# Altium PCB BM78SPP05NC2-Based-OBD-final.PcbDoc
Units mil, origin at the board's own origin, x right, y up, seen from the top; angles counter-clockwise.
Board outline 2896 x 2222 mil, 2 copper layers (Top Layer, Bottom Layer); 63 components, 39 nets, 267 pads, 140 vias.
Unrouted connection lines stored in the file: 3.
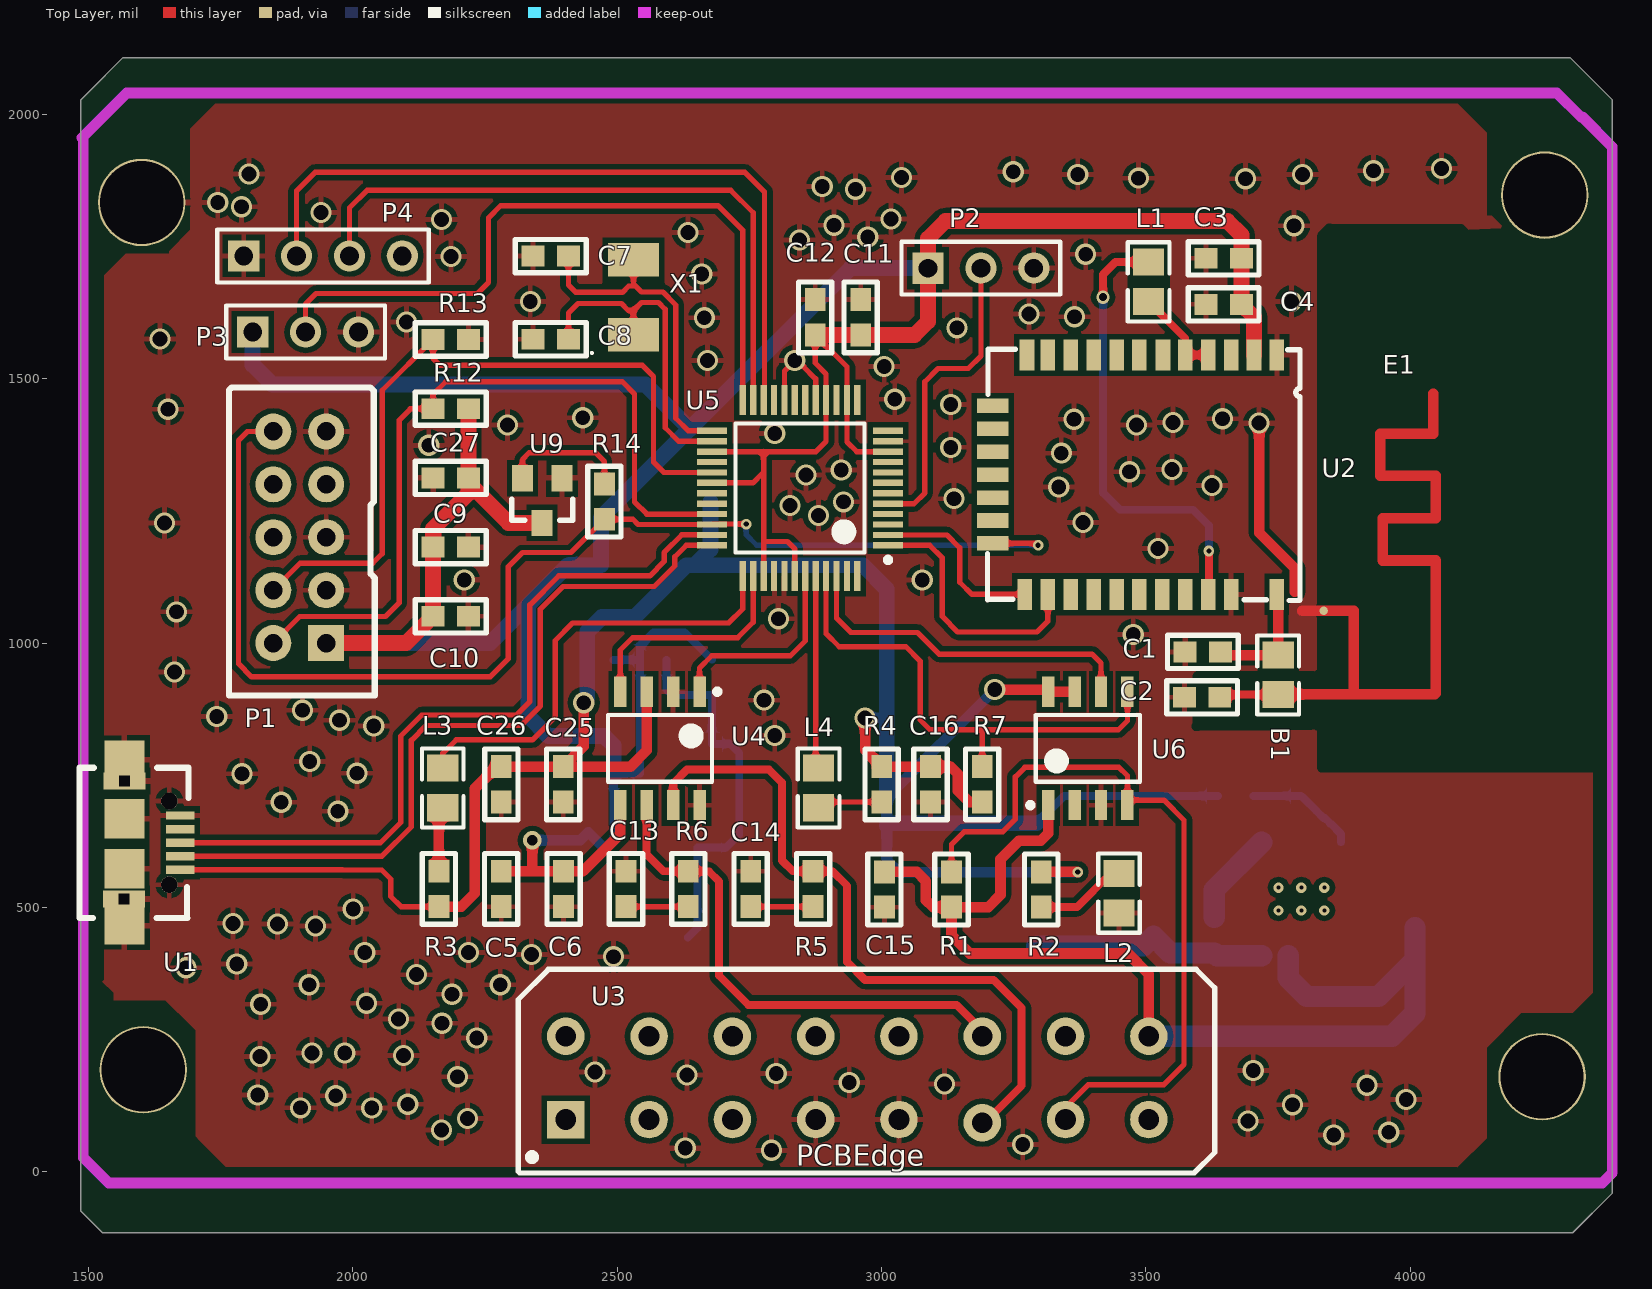
[diagram p0: Top Layer view]
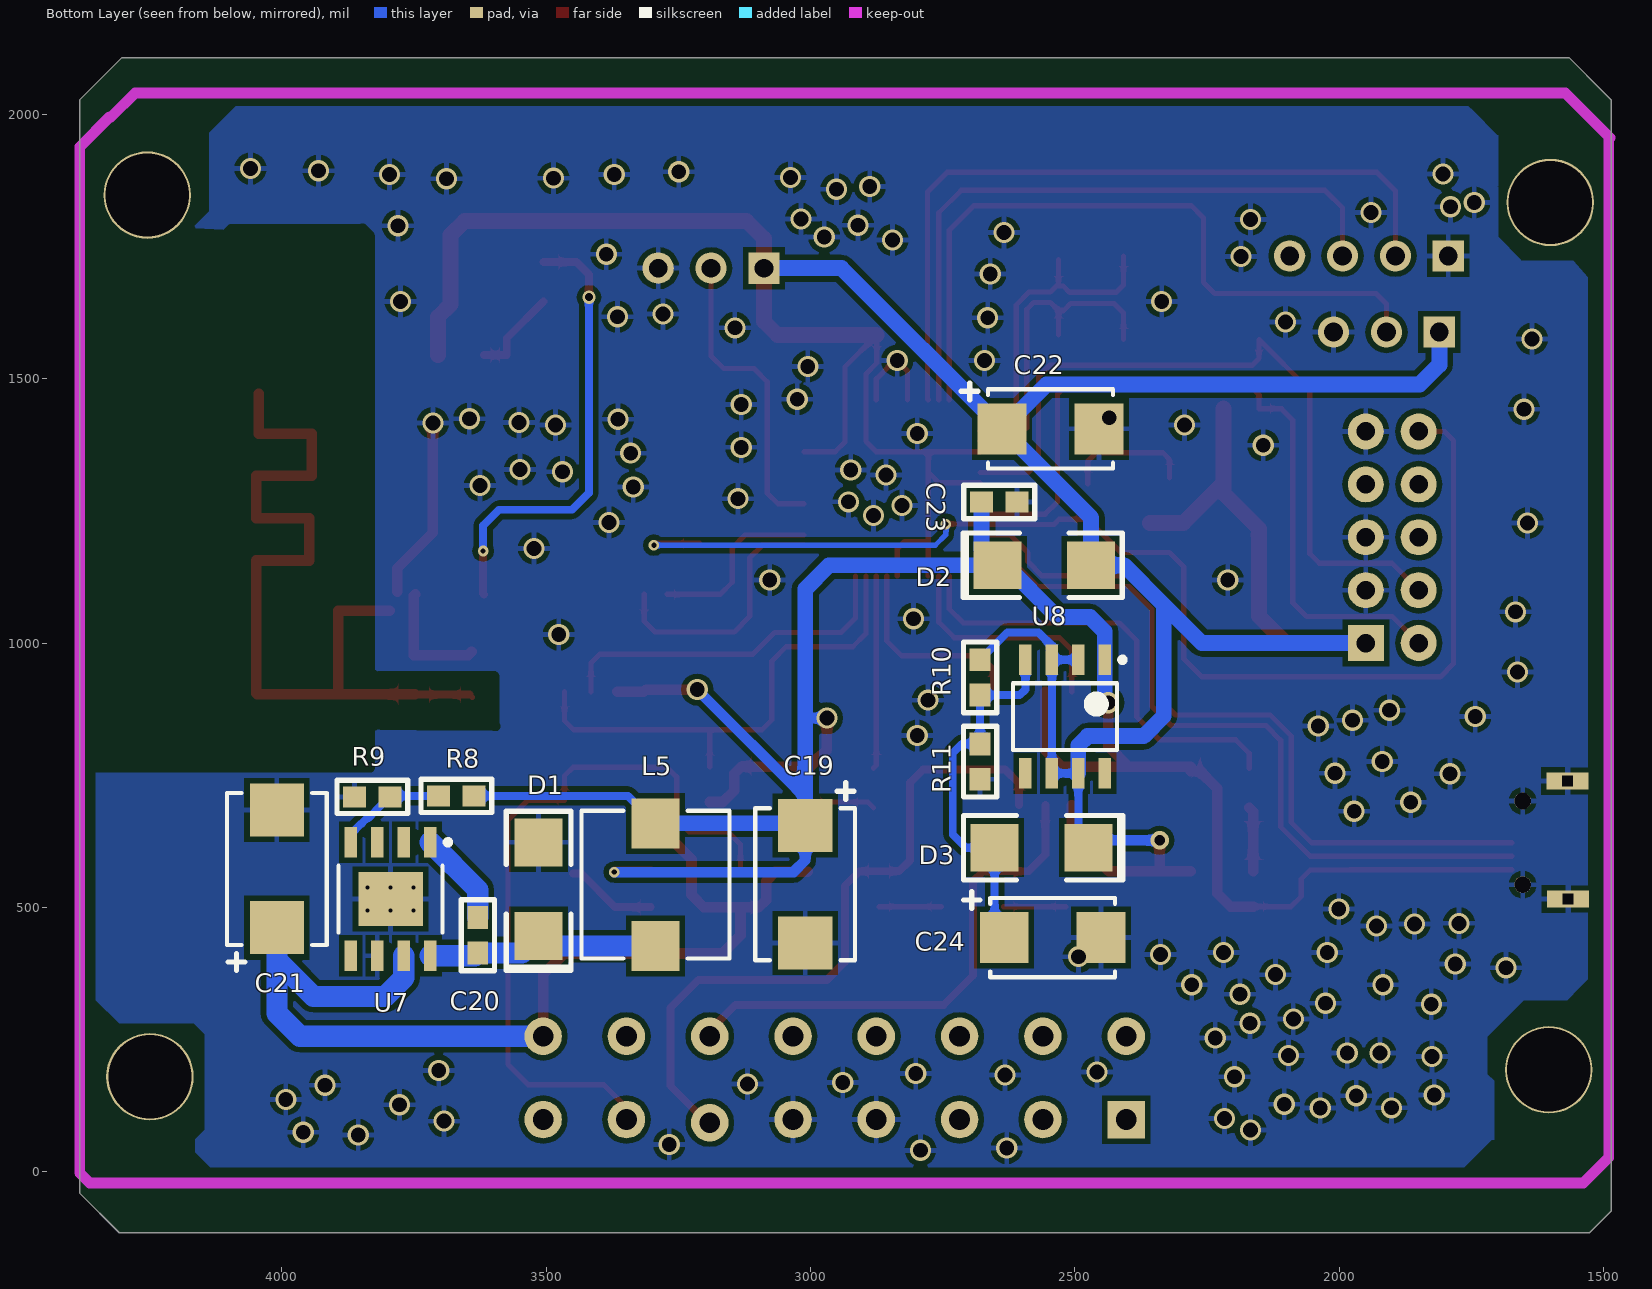
[diagram p1: Bottom Layer view, seen from below]

## Layer stack, top to bottom
Top Solder: solder mask 0.4, Solder Resist, Dk 3.5
Top Layer: signal copper 1.4
Dielectric 1: dielectric 12.6, FR-4, Dk 4.8
Bottom Layer: signal copper 1.4
Bottom Solder: solder mask 0.4, Solder Resist, Dk 3.5

## Board outline
1486,-74 1486,2027 1499,2040 1566,2107 4302,2107 4382,2027 4382,-40 4307,-115 1527,-115

## Design rules (kind name [scope] priority, off if disabled: settings)
Clearance [All] p1: gap=10
DiffPairsRouting DiffPair_DiffPairsRouting [InDifferentialPair ('NewDifferentialPair1')] p1: maxlimit=10 minlimit=5 mostfreqgap=10 toplayer_minwidth=10 toplayer_maxwidth=15 toplayer_prefwidth=10 bottomlayer_minwidth=10 bottomlayer_maxwidth=15 bottomlayer_prefwidth=10 maxuncoupledlength=2000
DiffPairsRouting DiffPair_DiffPairsRouting_1 [InDifferentialPair ('D_D')] p2: maxlimit=10 minlimit=5 mostfreqgap=10 toplayer_minwidth=10 toplayer_maxwidth=15 toplayer_prefwidth=15 bottomlayer_minwidth=10 bottomlayer_maxwidth=15 bottomlayer_prefwidth=15 maxuncoupledlength=500
DiffPairsRouting DiffPair_DiffPairsRouting_2 [InDifferentialPair ('D_D')] p3: maxlimit=10 minlimit=5 mostfreqgap=10 toplayer_minwidth=15 toplayer_maxwidth=15 toplayer_prefwidth=15 bottomlayer_minwidth=15 bottomlayer_maxwidth=15 bottomlayer_prefwidth=15 maxuncoupledlength=500
DiffPairsRouting DiffPair_DiffPairsRouting_3 [InDifferentialPair ('D_D')] p4: maxlimit=10 minlimit=10 mostfreqgap=10 toplayer_minwidth=15 toplayer_maxwidth=15 toplayer_prefwidth=15 bottomlayer_minwidth=15 bottomlayer_maxwidth=15 bottomlayer_prefwidth=15 maxuncoupledlength=500
DiffPairsRouting [All] p5: maxlimit=10 minlimit=10 mostfreqgap=10 toplayer_minwidth=10 toplayer_maxwidth=15 toplayer_prefwidth=15 bottomlayer_minwidth=10 bottomlayer_maxwidth=15 bottomlayer_prefwidth=15 maxuncoupledlength=500
MatchedLengths DiffPair_MatchedLengths [InDifferentialPair ('NewDifferentialPair1')] p1: tolerance=2000 checknetsindiffpair=TRUE checkdiffpairvsdiffpair=FALSE checkxsignals=FALSE checkothers=FALSE
MatchedLengths DiffPair_MatchedLengths_1 [InDifferentialPair ('D_D')] p2: tolerance=1000 checknetsindiffpair=TRUE checkdiffpairvsdiffpair=FALSE checkxsignals=FALSE checkothers=FALSE
MatchedLengths DiffPair_MatchedLengths_2 [InDifferentialPair ('D_D')] p3: tolerance=1000 checknetsindiffpair=FALSE checkdiffpairvsdiffpair=TRUE checkxsignals=TRUE checkothers=TRUE
MatchedLengths DiffPair_MatchedLengths_3 [InDifferentialPair ('D_D')] p4: tolerance=1000 checknetsindiffpair=TRUE checkdiffpairvsdiffpair=FALSE checkxsignals=FALSE checkothers=FALSE
PolygonConnect [All] p1: connectstyle=Relief reliefconductorwidth=10 reliefentries=4 polygonreliefangle="90 Angle" airgapwidth=10
RoutingVias [All] p1: holewidth=15 width=25 viastyle="Through Hole" minholewidth=10 minwidth=15 maxholewidth=28 maxwidth=40
SolderMaskExpansion [All] p1: expansion=4
Width [All] p1: maxlimit=50 minlimit=10 preferedwidth=15
29 further rules are at their usual default settings.

## Components (designator, comment, footprint, x,y, rotation, side; value= is the part's Value field where it differs from the comment)
B1 "1nH" 0805 3750,939.7 r270 top
C1 "15pf" 0603 3607.54,982.91 r0 top
C2 "15pF" 0603 3606,897 r0 top
C3 "0.1uF" 0603 3646.87,1727.04 r0 top
C4 "10uF" 0603 3646.87,1640 r0 top
C5 "10uF" 0603 2281.33,535 r90 top
C6 "0.1uF" 0603 2399.26,535 r90 top
C7 "22pF" 0603 2374.54,1732.06 r180 top
C8 "22pF" 0603 2374.54,1574.79 r180 top
C9 "4.7uF" 0603 2185.54,1181.85 r180 top
C10 "0.1uF" 0603 2185.54,1051 r180 top
C11 "10uF" 0603 2961,1615.83 r90 top
C12 "0.1uF" 0603 2875,1615.83 r90 top
C13 "560pF" 0603 2516.41,535 r270 top
C14 "560pF" 0603 2752.28,535 r270 top
C15 "0.1uF" 0603 3005,534 r270 top
C16 "0.1uF" 0603 3093,732.87 r90 top
C19 "220uF" CAPM-7.0*4.5 3010,544 r270 bottom
C20 "0.01uF" 0603 3629.39,447.54 r270 bottom
C21 "10uF/16V" CAPM-7.0*4.5 4009,573 r90 bottom
C22 "10uF/16V" CAPM-5.5*3.3 2546,1405 r180 bottom
C23 "0.1uF" 0603 2643,1267 r0 bottom
C24 "10uF/16V" CAPM-5.5*3.3 2542.13,443 r180 bottom
C25 "0.1uF" 0603 2397.74,732.87 r270 top
C26 "10uF" 0603 2280.73,732.87 r270 top
C27 "0.1uF" 0603 2185.54,1311.91 r0 top
D1 "B340A" DO214-AC 3514,534.58 r270 bottom
D2 "1N4007" DO214-AC 2558,1147 r0 bottom
D3 "1N4007" DO214-AC 2563.23,613 r180 bottom
E1 "PCB_ANT" BM78SPP05NC2_ANT 3748,903 r0 top
L1 "LED" 0805 3505,1683 r90 top
L2 "LED" 0805 3448.99,527.13 r270 top
L3 "LED" 0805 2170.44,726 r90 top
L4 "LED" 0805 2881,726 r90 top
L5 "15uH" 7*7*4-15uH 3293,543 r90 bottom
P1 "Debug" JATG_10pin 1950,1000 r180 top
P2 "" HDR1X3 3088,1708.87 r0 top
P3 "" HDR1X3 1811,1588 r0 top
P4 "downloader" HDR1X4 1794,1732 r0 top
R1 "510R" 0603 3132,534 r270 top
R2 "330R" 0603 3301.61,534 r270 top
R3 "330R" 0603 2163.39,535 r90 top
R4 "330R" 0603 3000,732.87 r270 top
R5 "100R" 0603 2871,535 r90 top
R6 "100R" 0603 2635.13,535 r90 top
R7 "3.3K" 0603 3190,732.87 r270 top
R8 "10K" 0603 3669.53,710.61 r180 bottom
R9 "3.24K" 0603 3828.46,708.61 r180 bottom
R10 "470R" 0603 2678.98,935 r90 bottom
R11 "820R" 0603 2678.98,776 r90 bottom
R12 "10K" 0603 2185.54,1443.55 r180 top
R13 "10K" 0603 2185.54,1574.39 r180 top
R14 "100K" 0603 2476.39,1267.46 r90 top
U1 "MicroUSB" Micro-USB 1568.68,780.07 r0 top
U2 "BM78SPP05NC2" BM78SPP05NC2 3200.29,1554.6 r270 top
U3 "OBD-Connector" OBD-MaleConnector 2403.08,99 r0 top
U4 "TJF1051T / 3" TJF1051 2574,798.77 r270 top
U5 "LPC1549" LPC1549JBD48 2847,1297 r180 top
U6 "MC33660EFR2" SOP-8 3390,800.77 r90 top
U7 "TPS5430" TPS5430 3794,516 r270 bottom
U8 "LM317L" LM317L 2518.64,860 r270 bottom
U9 "IMP809TEUR-T" SOT23-3 2358,1227 r180 top
X1 "12MHZ" 12Mhz-DFN 2530,1653 r270 top

## Footprints (in the part's own frame and the unit in brackets; to place one, negate y for a bottom-side part, rotate by r counter-clockwise, add the part's x,y. Pads: shape width x height; smd on the part's side, far side on the other; paste and mask are expansions set on the pad)
7*7*4-15uH [mm] "Precision Wire Wound Inductor, 2-Leads, Body 7.00x7.00mm, IPC Medium Density"
  rect 2.4x2.3 smd: 1(-2.95,0) 2(2.95,0)
  silkscreen extent -3.55,-3.55 3.55,3.55
12Mhz-DFN [mm]
  rect 1.6x2.45 smd: 1(1.78,0.025) 2(-1.82,0.025)
  silkscreen extent 2.6,-2.02 2.7,-1.92, body extent -2.65,-1.57 2.65,1.63, height 0.45
0603 [mm]
  rect 1.1x1 smd: 1(-0.85,0.01) 2(0.85,0.01)
  silkscreen extent -1.7,-0.79 1.7,0.81
0805 [mm]
  rect 1.3x1.5 smd: 1(-0.95,0) 2(0.95,0)
  silkscreen extent -1.9,-1 1.9,1
BM78SPP05NC2 [mm]
  rect 1.5x0.7 smd: 1(0.25,13.9) 2(0.25,12.8) 3(0.25,11.7) 4(0.25,10.6) 5(0.25,9.5) 6(0.25,8.43) 7(0.25,7.3) 8(0.25,6.2) 9(0.25,5.1) 10(0.25,4) 11(0.25,2.9) 12(0.25,1.9) 20(11.75,1.8) 21(11.75,2.9) 22(11.75,4) 23(11.75,5.1) 24(11.75,6.2) 25(11.75,7.3) 26(11.75,8.4) 27(11.75,9.5) 28(11.75,10.6) 29(11.75,11.7) 30(11.75,13.9)
  rect 0.7x1.5 smd: 13(2.7,0.25) 14(3.8,0.25) 15(4.9,0.25) 16(6,0.25) 17(7.1,0.25) 18(8.2,0.25) 19(9.3,0.25)
  silkscreen extent -0.03,0 12.04,15.01
BM78SPP05NC2_ANT [mm]
  round 0.4 smd: 1(0,0) 2(2.235,4.013)
  Top Layer lines w0.508: -0.002,0 0,0 0.051,0 3.683,0 ; 2.286,4.013 3.683,4.013 3.683,0.03 3.683,0 ; 7.493,14.427 7.493,12.522 4.953,12.522 4.953,10.49 7.62,10.49 7.62,8.458 5.08,8.458 5.08,6.426 7.62,6.426 7.62,0.051 ; 3.683,0 7.569,0 7.599,0.03 7.62,0.051 ; 7.62,0.051 7.62,0.051
CAPM-5.5*3.3 [mm]
  rect 2.35x2.45 smd: 1(-2.325,0) 2(2.325,0)
  silkscreen extent -4.29,-1.9 3,2.2
CAPM-7.0*4.5 [mm] "Molded Capacitor, 2-Leads, Body 7.00x4.50mm, IPC Medium Density"
  rect 2.55x2.6 smd: 1(-2.825,0) 2(2.825,0)
  silkscreen extent -4.87,-2.4 3.65,2.4
DO214-AC [mm]
  rect 2.3x2.3 smd: 1(-2.25,0) 2(2.25,0)
  silkscreen extent -3.75,-1.55 3.9,1.55
HDR1X3 [mm] "Connector; Header; 3 Position"
  rect 1.5x1.5 hole 0.9: 1(0,0)
  round 1.5 hole 0.9: 2(2.54,0) 3(5.08,0)
  silkscreen extent -1.27,-1.27 6.35,1.27
HDR1X4 [mm] "Connector; Header; 4 Position"
  rect 1.5x1.5 hole 0.9: 1(0,0)
  round 1.5 hole 0.9: 2(2.54,0) 3(5.08,0) 4(7.62,0)
  silkscreen extent -1.27,-1.27 8.89,1.27
JATG_10pin [mil]
  rect 68x68 hole 35: 1(0,0)
  round 68 hole 35: 2(100,0) 3(0,-100) 4(100,-100) 5(0,-200) 6(100,-200) 7(0,-300) 8(100,-300) 9(0,-400) 10(100,-400)
  silkscreen extent -92,-483 184,99
LM317L [mm]
  rect 1.45x0.6 smd: 1(-2.75,1.905) 2(-2.75,0.635) 3(-2.75,-0.635) 4(-2.75,-1.905) 5(2.7,-1.905) 6(2.7,-0.635) 7(2.7,0.635) 8(2.7,1.905)
  silkscreen extent -2.88,-2.5 1.57,2.88
LPC1549JBD48 [mm]
  rect 1.45x0.3 smd: 1(-4.2,2.852) 2(-4.2,2.352) 3(-4.2,1.852) 4(-4.2,1.352) 5(-4.2,0.852) 6(-4.2,0.352) 7(-4.2,-0.148) 8(-4.2,-0.648) 9(-4.2,-1.148) 10(-4.2,-1.648) 11(-4.2,-2.148) 12(-4.2,-2.648) 25(4.25,-2.648) 26(4.25,-2.148) 27(4.25,-1.648) 28(4.25,-1.148) 29(4.25,-0.648) 30(4.25,-0.148) 31(4.25,0.352) 32(4.25,0.852) 33(4.25,1.352) 34(4.25,1.852) 35(4.25,2.352) 36(4.25,2.852)
  rect 0.3x1.45 smd: 13(-2.725,-4.123) 14(-2.225,-4.123) 15(-1.725,-4.123) 16(-1.225,-4.123) 17(-0.725,-4.123) 18(-0.225,-4.123) 19(0.275,-4.123) 20(0.775,-4.123) 21(1.275,-4.123) 22(1.775,-4.123) 23(2.275,-4.123) 24(2.775,-4.123) 37(2.775,4.327) 38(2.275,4.327) 39(1.775,4.327) 40(1.275,4.327) 41(0.775,4.327) 42(0.275,4.327) 43(-0.225,4.327) 44(-0.725,4.327) 45(-1.225,4.327) 46(-1.725,4.327) 47(-2.225,4.327) 48(-2.725,4.327)
  silkscreen extent -4.32,-3 3.13,3.68
Micro-USB [mm]
  rect 2x0.8 hole 0.5 square: 1(-0.025,-6.706) 1(0,-1.041)
  rect 1.9x1.8 smd: 1(0,-8) 1(0,0)
  rect 1.9x1.9 smd: 1(0,-5.25) 1(0,-2.85)
  round 0.8 hole 0.8: 1(2.15,-6.02) 1(2.15,-2)
  rect 1.35x0.4 smd: 1(2.675,-2.7) 2(2.675,-3.35) 3(2.675,-4) 4(2.675,-4.65) 5(2.675,-5.3)
  silkscreen extent -2.16,-7.62 3.07,-0.41
OBD-MaleConnector [mm]
  rect 1.8x1.8 hole 1: 1(0,0)
  round 1.8 hole 1: 2(4,0) 3(8,0) 4(12,0) 5(16,0) 6(20,-0.152) 7(24,0) 8(28,0) 9(0,4) 10(4,4) 11(8,4) 12(12,4) 13(16,4) 14(20,4) 15(24,4) 16(28,4)
  silkscreen extent -2.29,-2.57 31.17,7.21
SOP-8 [mm]
  rect 1.45x0.6 smd: 1(-2.725,1.905) 2(-2.725,0.635) 3(-2.725,-0.635) 4(-2.725,-1.905) 5(2.725,-1.905) 6(2.725,-0.635) 7(2.725,0.635) 8(2.725,1.905)
  silkscreen extent -2.85,-2.5 1.6,2.88
SOT23-3 [mil]
  rect 40x50 smd: 1(-37.99,-85) 2(37.01,-85) 3(0.01,0)
  silkscreen extent -58,-45 57,-5
TJF1051 [mm]
  rect 1.45x0.6 smd: 1(-2.776,2.083) 2(-2.776,0.813) 3(-2.776,-0.457) 4(-2.776,-1.727) 5(2.674,-1.727) 6(2.674,-0.457) 7(2.674,0.813) 8(2.674,2.083)
  silkscreen extent -2.9,-2.32 1.55,3.06
TPS5430 [mm]
  rect 1.45x0.6 smd: 1(-2.725,1.905) 2(-2.725,0.635) 3(-2.725,-0.635) 4(-2.725,-1.905) 5(2.725,-1.905) 6(2.725,-0.635) 7(2.725,0.635) 8(2.725,1.905)
  rect 2.6x3.1 smd: 9(0,0)
  silkscreen extent -2.85,-2.5 1.6,2.88

## Part data
B1: library part Bead
C1 C2 C3 C4 C5 C6 C7 C8 C9 C10 C11 C12 C13 C14 C15 C16 C20 C23 C25 C26 C27: library part Cap1, "ceramic"
C19 C21 C22 C24: library part Cap3, "aluminum"
D1: library part B340A-13-F
L5: library part Inductor
P1: library part JTAG_10Pin
P2 P3: library part "Header 3", "Header, 3-Pin"
P4: library part "Header 4", "Header, 4-Pin"
R1 R2 R3 R4 R5 R6 R7 R8 R9 R10 R11 R12 R13 R14: library part Res
U1: library part MicroUSB_B
U3: library part OBD-MaleHead
U5: library part LPC1549JBD48
X1: library part OSC

## Free pads (board coordinates)
  round 165.35 hole 157.48: 120(4254,1847) 121(1601,1833) 122(1604,193) 123(4249,180)

## Via types
v1: diameter 40, hole 28, Top Layer to Bottom Layer, 128 vias
v2: diameter 19.68, hole 7.87, Top Layer to Bottom Layer, 6 vias
v3: diameter 20, hole 10, Top Layer to Bottom Layer, 4 vias
v4: diameter 35, hole 20, Top Layer to Bottom Layer, 1 vias
v5: diameter 25, hole 15, Top Layer to Bottom Layer, 1 vias

## Nets (pads, with @x,y where several pads share a name; then routed paths per layer and width w, separated by ;. In a path a pad name is that pad's centre, name@x,y a point inside that pad or via, vN(x,y) a via of type N, cw(c..) or ccw(c..) an arc to the next point about the centre after c; other vN are vias at no path point)
3.3V: C3.2 C4.2 C5.2 C6.2 C9.2 C10.2 C11.1 C12.1 C22.1 C27.2 D2.1 D3.2 P1.1 P2.1 P3.1 R10.2 R12.1 U2.2 U4.5 U5.10 U5.14 U5.16 U5.27 U5.30 U5.39 U5.42 U8.2 U8.3 U8.6 U8.7 U9.3 | length 7284.7
  Top Layer w10: U5.30 2756.84,1302.84 2774,1320 ; U5.27 2777.1,1361.9 ; U5.39 2777.1,1193 ; U5.42 2836.16,1177.84 2822,1192 2778.1,1192 2777.1,1193 ; C12.1@2874.61,1572.39 2874.61,1529.39 2895.21,1508.79 U5.16 2895.21,1381.21 2875.9,1361.9 2777.1,1361.9 ; C12.1 2934.58,1522.39 U5.14 2934.58,1380.42 2953.1,1361.9 U5.10 ; 2777.1,1193 2777.1,1361.9
  Top Layer w20: C5.2 2340,568.46 ; v4(2340,627) 2340,568.46 ; U4.5 2506,639 2435.46,568.46 C6.2 2340,568.46
  Top Layer w30: P1.1 2101.47,1000 C10.2 C9.2 2152.07,1216.07 2219,1283 C27.2@2219,1303 ; R12.1 C27.2 C27.2@2219,1303 ; U9.3 2295,1227 C27.2@2219,1303 ; C12.1 C11.1 3062.36,1582.36 3088,1608 P2.1 3088,1765 3121,1798 3654,1798 3680.34,1771.66 C3.2 C4.2 3704.23,1616.5 U2.2
  Bottom Layer w15: D3.2 2493.64,631.99 U8.7 U8.6 U8.3 ; U8.2 U8.3 ; R10.2 2627.84,1020 2569,1020 2543.64,994.64 U8.3
  Bottom Layer w20: v4(2340,627) 2430.65,627 2445.65,642 D3.2
  Bottom Layer w30: P3.1 1811,1526 1848,1489 2553.54,1489 C22.1 ; P1.1 2260,1000 2332,1072 ; U8.7 2493.64,806.36 2476,824 2370,824 2332,862 2332,1072 ; P2.1 2941.4,1708.87 C22.1 ; 2332,1072 2407,1147 D2.1 2469.42,1236.88 C22.1
5V: C16.2 C19.1 C23.2 C25.1 C26.1 D2.2 L5.2 R2.1 R3.1 R4.1 R7.2 R8.2 U1.5 U4.3 U6.7 U6.8 U8.1 | length 4753.3
  Top Layer w10: U1.5 1980.93,571.41 1981.31,571.03 2054.97,571.03 2072,554 2072,521 2091.46,501.54 R3.1
  Top Layer w20: R3.1 2205.54,501.54 2231,527 2231,725 2263.69,757.69 2281.13,757.69 C26.1 C25.1 ; v1(2437,887) 2437,805.21 C25.1 ; U4.3 2556,797 2525.34,766.34 C25.1 ; v1(2969,858) 2969,797.73 R4.1 C16.2 3130.66,766.34 3144,753 3144,721 3165.59,699.41 R7.2 ; v1(3214,912) 3311.06,912 U6.8 U6.7 ; R2.1 3370.46,567.46 v3(3370.93,567)
  Bottom Layer w15: L5.2 3344.86,711 R8.2
  Bottom Layer w20: v1(2969,858) 3008,858 3010,856 ; v1(3214,912) 3010,708 C19.1 3010,589 3032,567 v3(3370.93,567)
  Bottom Layer w30: v1(2437,887) 2443.64,893.64 U8.1 2443.64,1021.64 2471,1049 2533,1049 2631,1147 D2.2 ; C23.2 2676.47,1176.88 D2.2 ; C19.1 3013.92,659.14 L5.2 ; 3010,708 3010,856 3010,1102 2965,1147 D2.2
12V: C15.1 C21.1 R1.2 U3.16 U6.1 U7.7 | length 2090.8
  Top Layer w20: C15.1 3066.46,567.46 3084,549.93 3084,514 3097.46,500.54 R1.2 ; U6.1 3315,640 3301,626 3260,626 3225,591 3225,524 3201.54,500.54 R1.2 ; U3.16 3505.44,373.56 3466,413 3167,413 3132.39,447.61 R1.2
  Bottom Layer w40: U3.16 3965.48,256.48 4009,300 4009,401 ; U7.7 3769,367 3804,332 3940,332 4009,401 ; C21.1 4009,401
ADJ: C24.1 D3.1 R10.1 R11.2 U8.4 | length 718.1
  Bottom Layer w15: U8.4 2593.64,912.36 2604.46,901.54 R10.1 R11.2 2713.54,809.46 2731,792 2731,638 2706,613 D3.1 2651.82,461.16 C24.1
BL_RX: U2.20 U5.2 | length 343.5
  Top Layer w10: U5.2 3123.58,1204.42 3148,1180 3148,1115 3171,1092 U2.20
BL_TX: U2.21 U5.1 | length 494
  Top Layer w10: U5.1 3091.27,1184.73 3115,1161 3115,1050 3144,1021 3294,1021 3314.46,1041.46 U2.21
BOOT: C20.1 U7.1 | length 179.6
  Bottom Layer w40: C20.1 3629,533.28 U7.1
CAN_H: R5.2 U3.6 U4.7 | length 1319.1
  Top Layer w15: U4.7 2606,735 2632,761 2787,761 2812,736 2812,589 2832.54,568.46 R5.2 2907.54,568.46 2935,541 2935,397 2969,363 3212,363 3265,310 3265,163 3195,93 U3.6
CAN_L: R6.2 U3.14 U4.6 | length 981
  Top Layer w15: U4.6 2556,600 2587.54,568.46 R6.2 2673.54,568.46 2693,549 2693,371 2748,316 3142,316 3190.48,267.52 U3.14
D+: U1.3 U5.35 | length 1460.1
  Top Layer w10: U1.3 1990.62,622.59 1991,622.21 2052.21,622.21 2091,661 2091,824.28 2130.72,864 2309.72,864 2335,889.28 2335,1072.28 2389.72,1127 2562,1127 2589,1154 2589,1171.28 2622.45,1204.73 U5.35@2679.66,1204.73
D-: U1.4 U5.36 | length 1462.4
  Top Layer w10: U1.4 1980.94,597 1981.31,596.62 2054.91,596.62 2111,652.72 2111,816 2139,844 2318,844 2355,881 2355,1064 2398,1107 2570.28,1107 2609,1145.72 2609,1163 2630.73,1184.73 U5.36
GND: B1.2 C1.1 C2.1 C2.2 C3.1 C4.1 C5.1 C6.1 C7.2 C8.2 C9.1 C10.1 C11.2 C12.2 C13.1 C14.1 C15.2 C16.1 C19.2 C21.2 C22.2 C23.1 C24.2 C25.2 C26.2 C27.1 D1.1 E1.1 E1.2 L2.2 P1.3 P1.5 P1.9 P2.3 P3.3 P4.1 pad.120 pad.121 pad.122 pad.123 R9.1 R11.1 R13.1 U1.1 U2.1 U2.29 U3.4 U3.5 U4.2 U4.8 U5.11 U5.17 U5.20 U5.40 U5.41 U6.3 U7.6 U7.9 U9.1 | length 675
  Top Layer w10: U5.20 2816.47,1514.47 2831,1529 v1@2836,1529 ; v1(2836,1534) 2846,1524 v1@2853,1524 ; v1@2852,1523 2875.53,1499.47 U5.17 ; C2.2 C2.2@3644.37,902.3
  Top Layer w15: C2.2@3644.37,902.3 B1.2
  Top Layer w20: v1(3714,1416) 3714,1208.84 3781.32,1141.53 3781.32,1096.68 ; 3796,1061 E1.2
  other v1: 2792,41 2629,45 3267,52 3855,70 3959,75 2168,79 3693,96 2217,101 1901.55,121.18 2036,121 3777,127 2104.08,128 3992,137 1968,144 1820.61,145.61 3918,164 3119,166 2939,169 2198,180 2632,183 2801,186 2458,189 3703,192 1825,218 2096.18,220.02 1923,225 1985,225 2234.61,253.39 2169,281 2087,289 1826.08,317 2026,319 2188,336 1917.79,353.82 2279,354 2121,373 1685,386 1781,393 2493,407 2338,411 2023,415 2219,415 1930,465 1858,469 1774,470 2001,497 1972,682 1865,699 1791,753 2008.21,753.82 1919,776 2798,825 2040,843 1975,854 1743,861 1905,873 2778,892 1663,945 3476,1016 2805,1046 1667,1059 2211,1119 3077,1119 3523,1179 1644,1227 3381,1228 2881,1241 2827,1260 2928,1267 3137,1273 3335,1295 3625,1298 2857,1318 3469,1324 2924,1327 3549,1328 3340,1359 3131,1370 2144,1374 2798,1396 2293,1412 3482,1412 3551,1417 3364,1423 3645,1424 2435,1426 1651,1442 3131,1451 3025,1461 3005,1523 2671,1534 1636,1575 3143,1596 2102,1607 2665,1614.92 3365,1617 3279,1622 2336,1646 3775,1646 2660,1698 2186,1731 3386,1735 2845,1762 2974,1768 2634,1776 3780,1789 2910,1790 2168,1801 3018,1802 1940,1814 1790,1825 1745,1833 2951,1858 2888,1863 3688,1878 3486,1879 3038,1880 3371,1886 3796,1886 1804,1887 3249,1891 3930,1893 4059,1897
ISP0: P2.2 U5.5 | length 580.3
  Top Layer w10: U5.5 3061.47,1263.47 3082,1284 3082,1494 3107,1519 3164,1519 3188,1543 P2.2
ISP1: P3.2 U5.24 | length 1368.5
  Top Layer w10: P3.2 1911,1641 1931,1661 2236,1661 2257,1682 2257,1804 2280,1827 2691,1827 2737.73,1780.27 U5.24
K-LINE: R1.1 U3.7 U6.4 | length 1409.6
  Top Layer w10: R1.1 3132.39,619.39 3156,643 3229,643 3253,667 3253,747 3271,765 3449,765 3465,749 3465,703 3534,703 3572,665 3572,203 3534,165 3391,165 3347.96,121.96 U3.7
LED: L1.2 U2.28 | length 864.9
  Top Layer w15: v5(3419,1654) 3419,1697 3442.4,1720.4 L1.2 ; U2.28 3619,1093.39 v3(3619,1174)
  Bottom Layer w15: v5(3419,1654) 3419,1284 3451,1252 3589,1252 3619,1222 v3(3619,1174)
NetB1_1: B1.1 C1.2 U2.30 | length 227.5
  Top Layer w20: C1.2 3647.21,977.1 B1.1 3750,1089.54 U2.30
NetC7_1: C7.1 U5.25 X1.2 | length 624.4
  Top Layer w10: C7.1 2408,1677 2421.97,1663.03 2510.03,1663.03 2522.03,1675.03 2533,1675.03 2533,1676.79 2546,1663.79 2586.5,1663.79 2611,1639.28 2611,1425 2634.73,1401.27 U5.25 ; 2531,1678.79 X1.2
NetC8_1: C8.1 U5.26 X1.1 | length 626.1
  Top Layer w10: C8.1 2408,1624.03 2425.97,1642 2508,1642 2521.21,1628.79 2531,1628.79 ; X1.1 2531,1628.79 ; U5.26 2616.42,1381.58 2591,1407 2591,1631 2578.21,1643.79 2546,1643.79 2531,1628.79
NetC13_2: C13.2 R6.1 | length 117.9
  Top Layer w10: C13.2 R6.1
NetC14_2: C14.2 R5.1 | length 117.9
  Top Layer w10: C14.2 R5.1
NetC20_2: C20.2 D1.2 L5.1 U7.8 | length 449.4
  Bottom Layer w40: L5.1 3494.86,426.86 D1.2 3545.93,414.07 C20.2 3634.35,408.72 U7.8
NetL1_1: L1.1 U2.4 U2.5 | length 172.9
  Top Layer w15: L1.1 3574.31,1576.29 U2.5 U2.4
NetL2_1: L2.1 R2.2 | length 173.5
  Top Layer w15: R2.2 3369.54,500.54 3433.53,564.53 L2.1
NetL3_1: L3.1 R3.2 | length 123.2
  Top Layer w20: R3.2 2163,681.16 L3.1
NetL4_1: L4.1 R4.2 | length 123.9
  Top Layer w10: L4.1 2891.81,699.41 R4.2
NetR7_1: R7.1 U5.45 U6.5 | length 952.1
  Top Layer w10: U5.45 2895.21,1017.79 2920,993 3046,993 3073,966 3073,855 3092,836 3187,836 ; R7.1 3190.39,832.61 3187,836 ; U6.5 3465,853 3448,836 3187,836
NetR14_2: R14.2 U9.2 | length 244.5
  Top Layer w10: U9.2 2320.99,1346.99 2334,1360 2459,1360 2476,1343 R14.2
NetU4_1: U4.1 U5.43 | length 388.7
  Top Layer w10: U4.1 2656,953 2679,976 2828,976 2855.84,1003.84 U5.43
NetU4_4: U4.4 U5.38 | length 439.3
  Top Layer w10: U4.4 2506,987 2529,1010 2728,1010 2757.42,1039.42 U5.38
NetU5_46: U5.46 U6.6 | length 668.9
  Top Layer w10: U5.46 2914.9,1047.1 2942,1020 3068,1020 3109,979 3398,979 3415,962 U6.6
PIN_37: L3.2 U5.37 | length 855.4
  Top Layer w10: L3.2 2170.44,791.44 2196,817 2340,817 2383,860 2383,1005 2416,1038 2711,1038 2737.73,1064.73 U5.37
PIN_44: L4.2 U5.44 | length 365.5
  Top Layer w10: U5.44 2875.53,768.87 L4.2
R\S\T\: P1.10 R14.1 U2.19 U5.34 | length 2363
  Top Layer w10: P1.10 1801,1400 1784,1383 1784,961 1809,936 2260,936 2294,970 2294,1144 2321,1171 2413,1171 R14.1 2530,1234 2539.9,1224.1 U5.34 ; U5.34@2679.56,1224 U5.34 ; v3(2744,1225) 2680.56,1225 U5.34 ; U2.19 3292.54,1188.46 v3(3296,1185)
  Bottom Layer w10: v3(2744,1225) 2744,1205 2764,1185 v3(3296,1185)
RX: P4.2 U5.22 | length 1432.2
  Top Layer w10: P4.2 1894,1855 1929,1890 2742,1890 2778.88,1853.12 2778.88,1461.12 U5.22
SWDCLK: P1.4 R13.2 U5.29 | length 1427.2
  Top Layer w10: P1.4 1901,1151 2038,1151 2056,1169 2056,1477.93 R13.2 2152.07,1537.93 2165,1525 2548,1525 2569,1504 2569,1342 2588.47,1322.53 U5.29
SWDIO: P1.2 R12.2 U5.33 | length 1478.2
  Top Layer w10: P1.2 1900,1050 2062,1050 2088,1076 2088,1421 2108.7,1441.7 ; U5.33 2556.21,1243.79 2533,1267 2533,1471 2510,1494 2176,1494 2152.07,1470.07 R12.2 2110.15,1443.15 ; 2108.7,1441.7 2110.15,1443.15 ; 2108.7,1441.7 2108.7,1443.15 2110.15,1443.15
TX: P4.3 U5.23 | length 1239.9
  Top Layer w10: P4.3 1994,1823 2027,1856 2715,1856 2757.42,1813.58 U5.23
VFB: R8.1 R9.2 U7.4 | length 211.6
  Bottom Layer w15: R8.1 3793,711 R9.2 3796,709 3822.77,682.23 3822.77,682.07 3835.51,669.33 3838.06,669.33 3848.31,659.08 3848.92,659.08 3869,639 U7.4
pads on no net: P1.6 P1.7 P1.8 P4.4 U1.2 U2.3 U2.6 U2.7 U2.8 U2.9 U2.10 U2.11 U2.12 U2.13 U2.14 U2.15 U2.16 U2.17 U2.18 U2.22 U2.23 U2.24 U2.25 U2.26 U2.27 U3.1 U3.2 U3.3 U3.8 U3.9 U3.10 U3.11 U3.12 U3.13 U3.15 U5.3 U5.4 U5.6 U5.7 U5.8 U5.9 U5.12 U5.13 U5.15 U5.18 U5.19 U5.21 U5.28 U5.31 U5.32 U5.47 U5.48 U6.2 U7.2 U7.3 U7.5 U8.5 U8.8
copper on no net:
  other v2: 3750.69,494.35 3794,494.35 3837.31,494.35 3750.69,537.65 3794,537.65 3837.31,537.65

## Polygon pours and split planes (outlines as drawn)
GND on Bottom Layer "GND" (solid, remove dead copper, pour order 10): 1557,1722 1558,1723 1657,1723 1657,1725 1700,1768 1700,1862 1701,1863 1700,1864 1700,1960 1701,1960 1748,2007 1756,2015 4013,2015 4087,2015 4134,1968 4137,1965 4137,1832 4137,1816 4246,1707 4307,1646 4328,1646 4336,1646 4351,1631 4351,336 4351,325 4312,286 4307,281 4250,281 4166,281 4161,276 4145,260 4145,179 4145,80 4157,68 4163,62 4163,40 4163,37 4142,16 4135,9 2311,9 1764,9 1745,28 1712,61 1707,61 1707,172 1717,182 1720,185 1720,253 1720,256 1671,305 1651,325 1587,325 1569,325 1546,348 1530,364 1530,1692
GND on Top Layer "GND" (solid, remove dead copper, pour order 12): 1530,1691 1530,1695 1558,1723 1571,1736 1653,1736 1653,1741 1693,1781 1693,1972 1741,2020 1744,2023 1827,2023 4086,2023 4139,1970 4144,1965 4144,1808 4154,1808 4310,1652 4345,1617 4345,1554 4345,339 4343,337 4307,301 4219,301 4210,301 4145,236 4144,235 4144,109 4144,64 4089,9 4088,10 3831,10 1760,10 1711,59 1703,67 1703,169 1703,268 1696,275 1646,325 1548,325 1548,339 1527,360 1530,363 1530,1684

## Keep-outs
Keep-Out Layer:
  lines w20: 4323,1994 4277,2040 1573,2040 1528,1995 1488,1955 1491,1955 1491,27 1539,-21 4363,-21 4382,-2 4382,64 4382,1938 4324.5,1995.5

## Silkscreen, mask and mechanical layers (free items; w line width, h text height)
Top Solder:
  lines w20: 3751,903 4046,903 4047,904 4047,1155 4044,1158 3947,1158 3948,1159 3948,1236 3949,1237 4046,1237 4047,1238 4047,1315 4044,1318 3943,1318 3943,1397 4043,1397 4043,1472 ; 3837,1060 3894,1060 3893,1059 3893,910

## Dimensions
1491,1955 to 4382,1938 on Top Overlay
1573,2040 to 1539,-21 on Top Overlay

## Text inside footprints (layer, text, board x,y; h text height)
U3: Top Overlay "PCBEdge" at 2839.08,12 h39.37